# Altium PCB STM32F1xx.PcbDoc
Units mm, origin at the board's own origin, x right, y up, seen from the top; angles counter-clockwise.
Board outline 60.58 x 53.09 mm, 2 copper layers (Top Layer, Bottom Layer); 32 components, 61 nets, 183 pads, 186 vias.
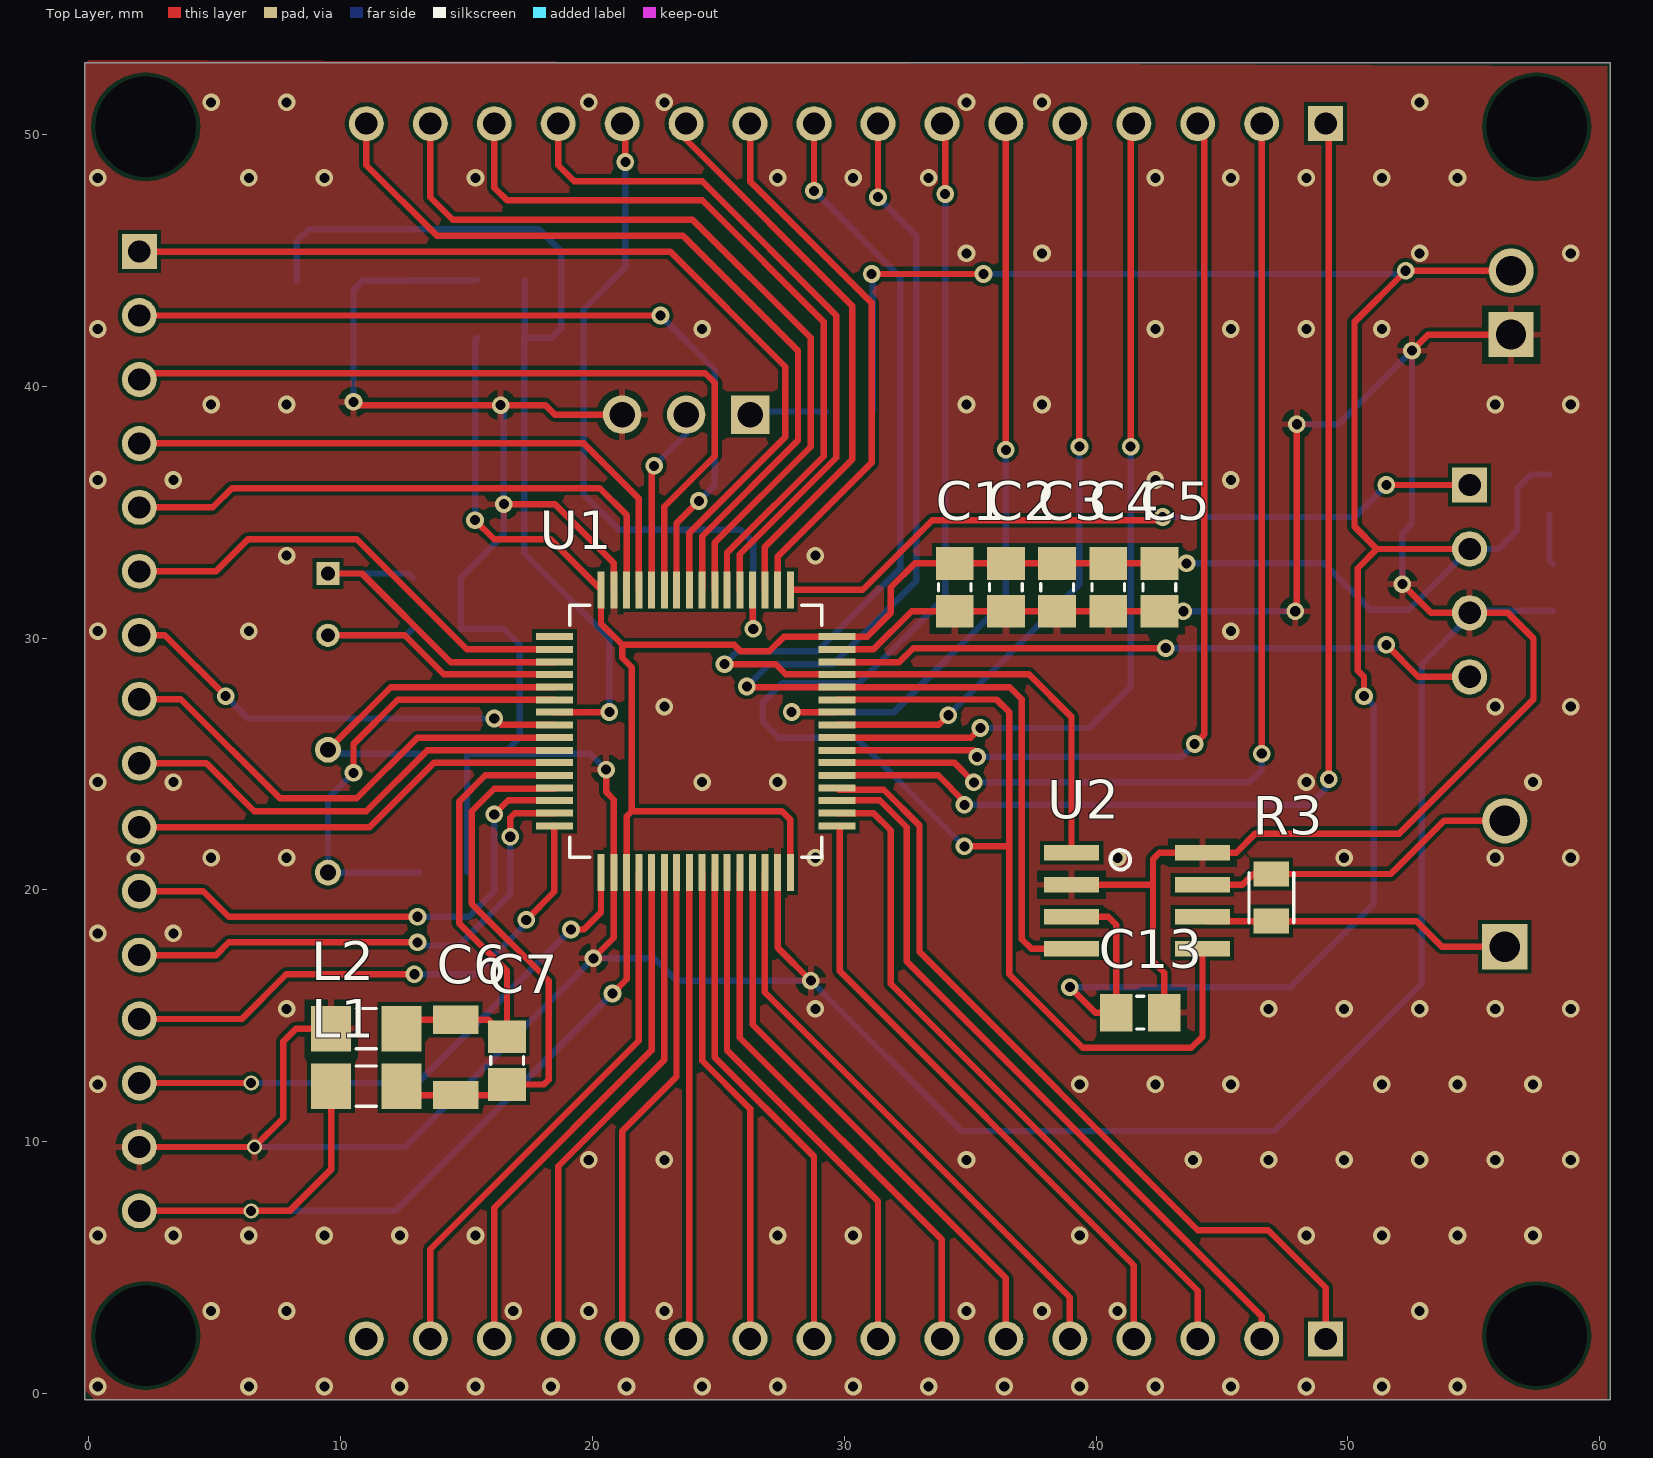
[diagram p0: Top Layer view]
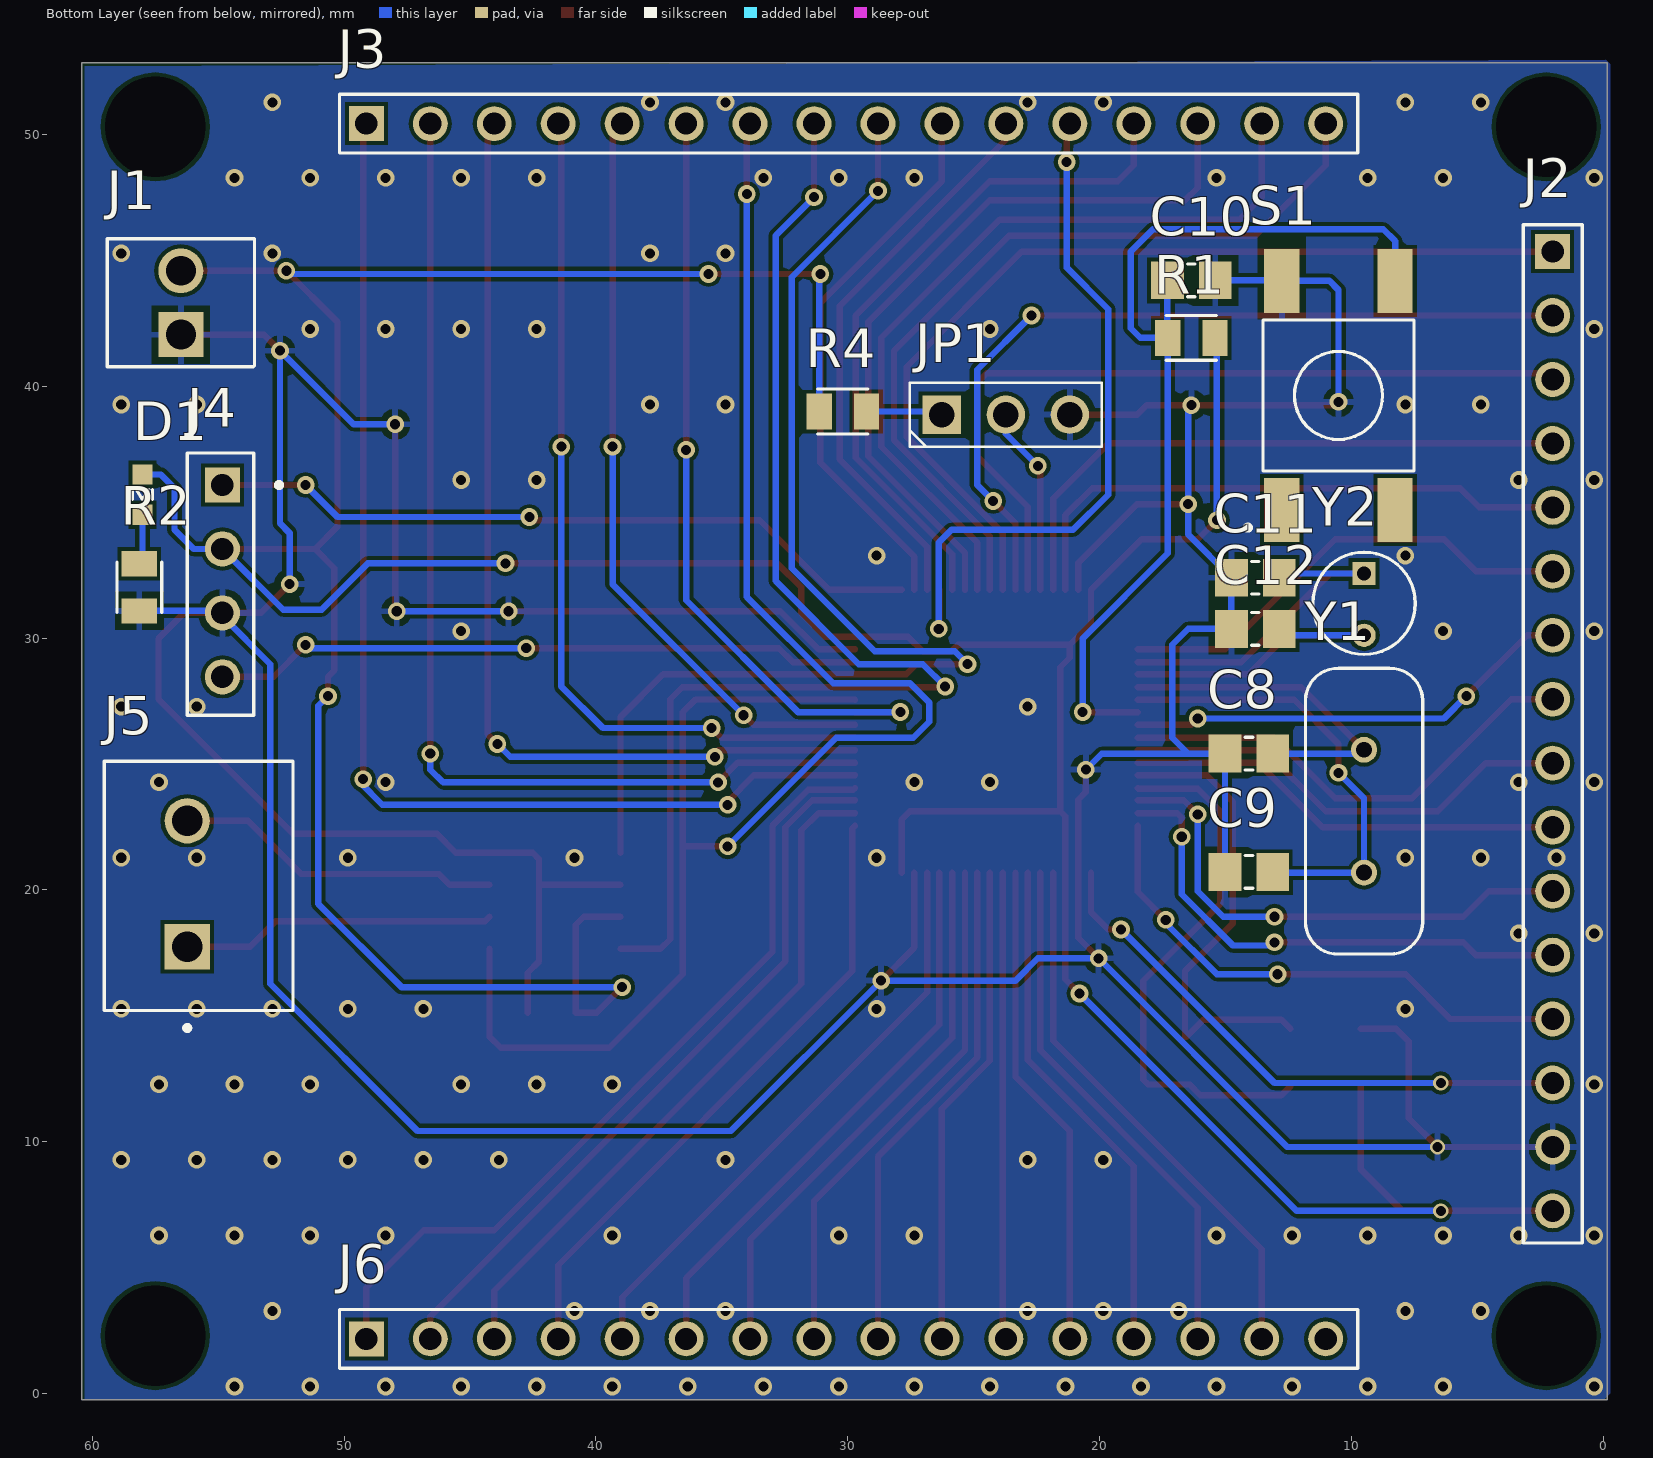
[diagram p1: Bottom Layer view, seen from below]
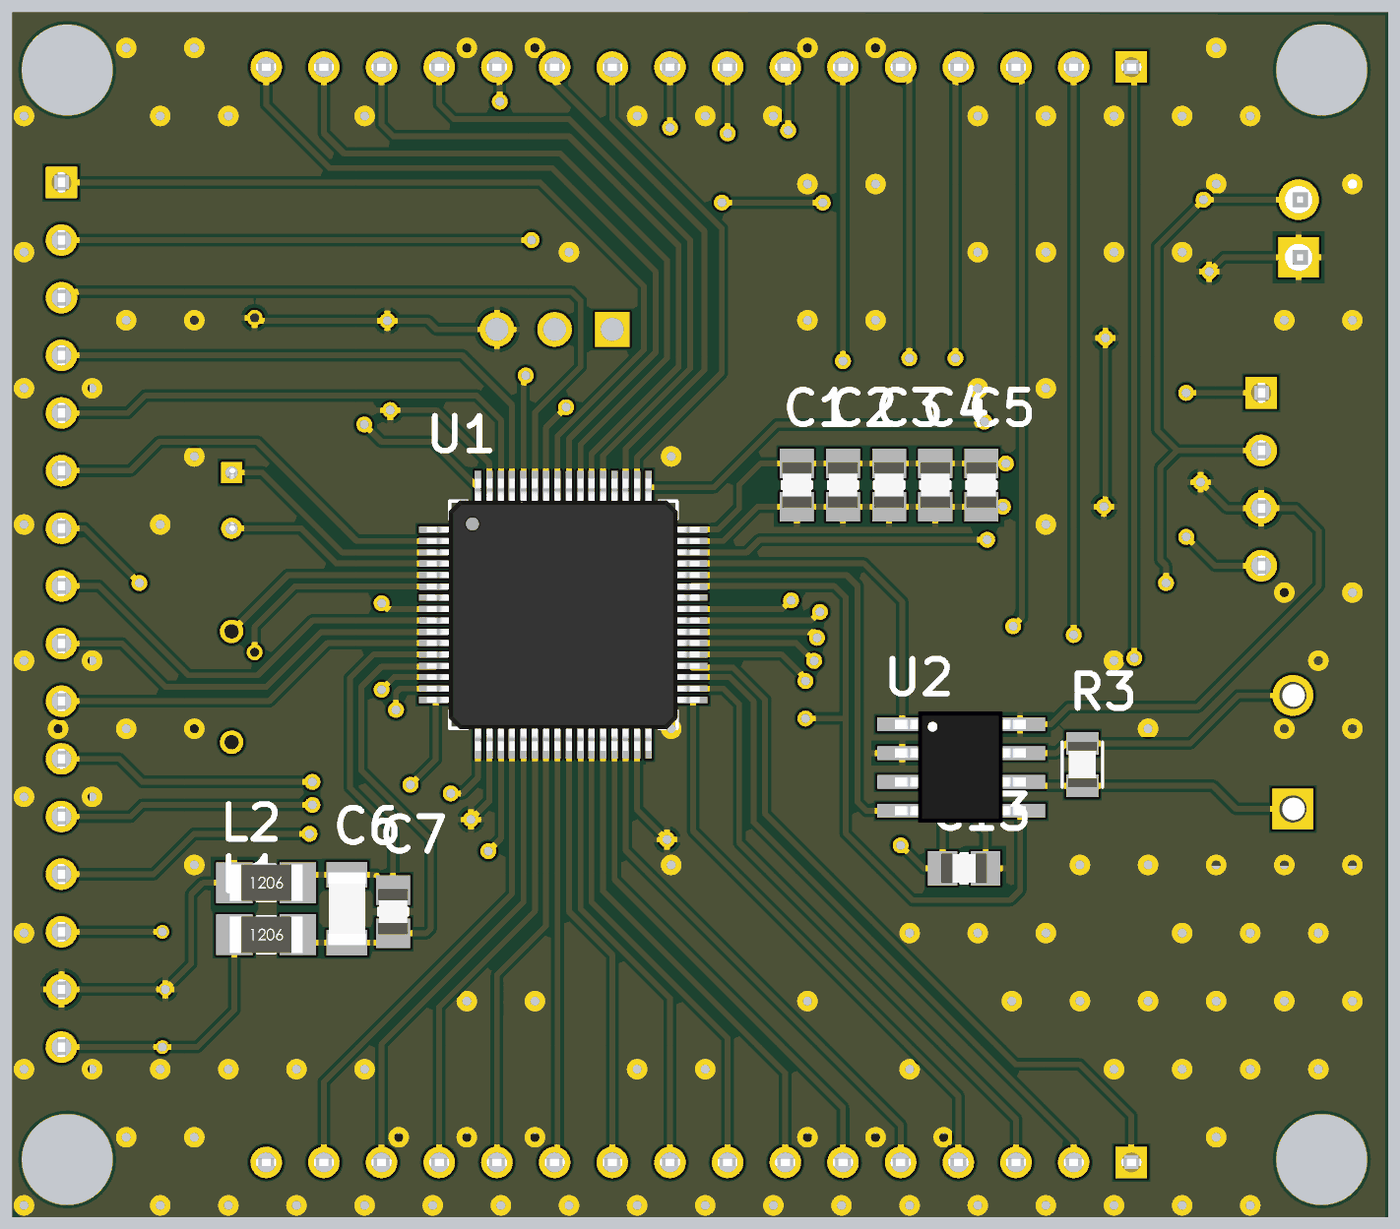
[diagram p2: 3D render of the assembled board from above, using the file's embedded part models]
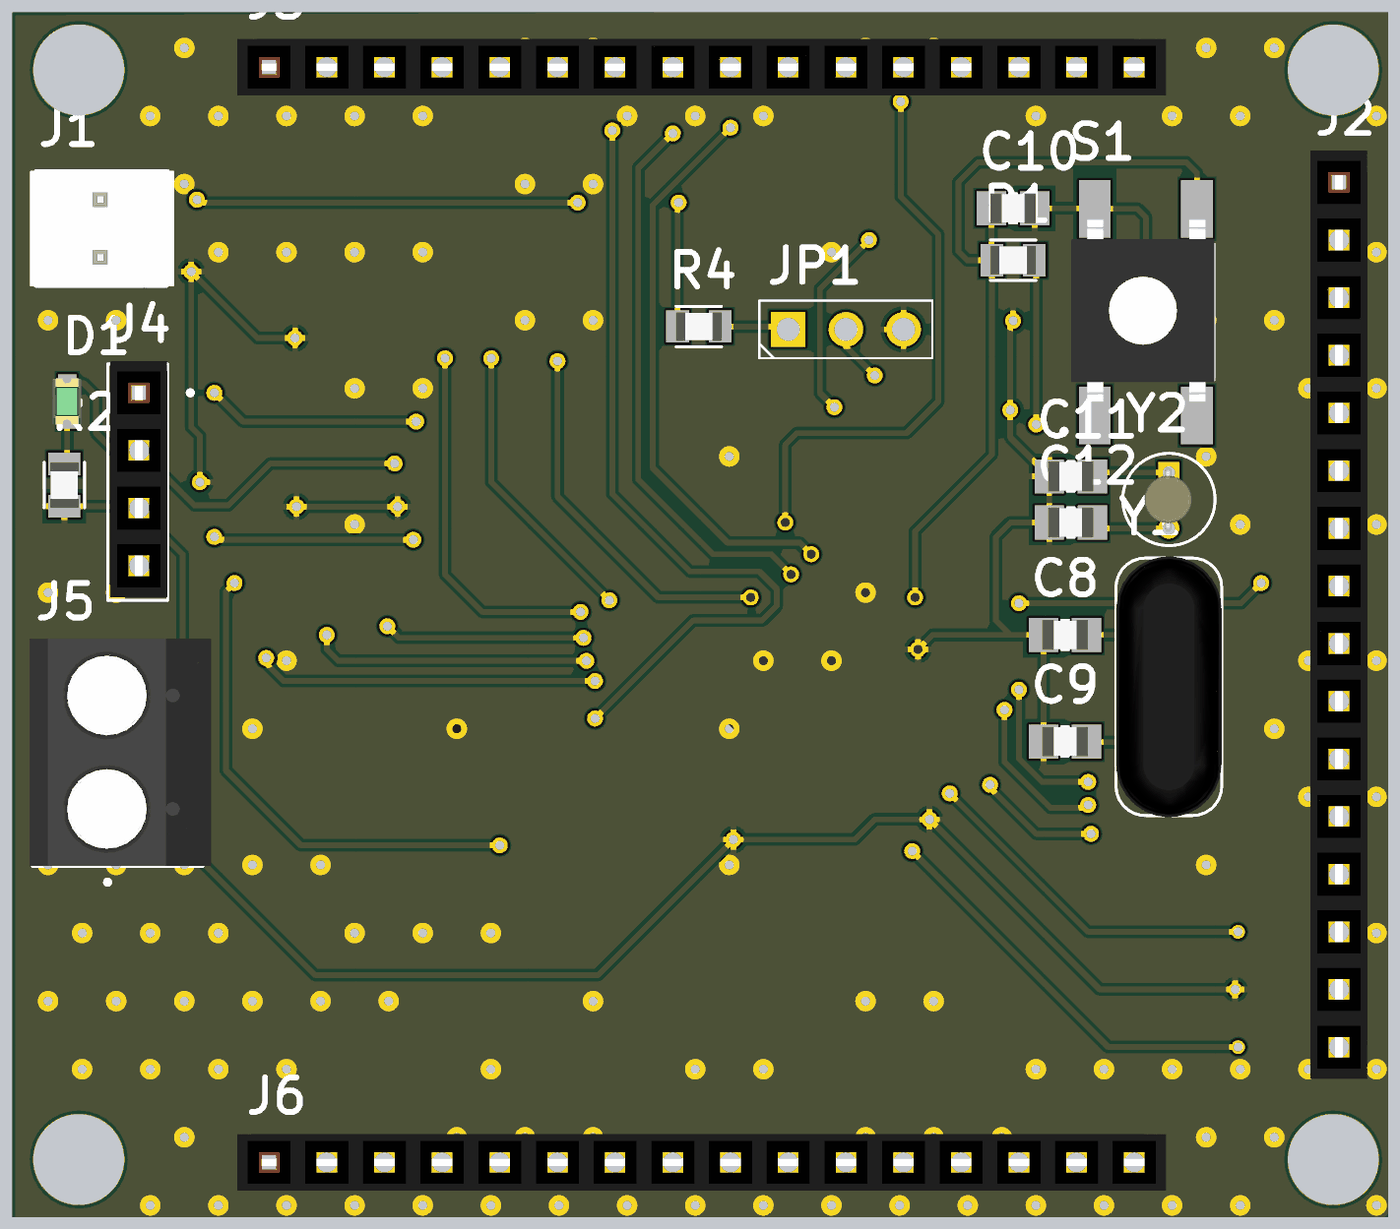
[diagram p3: 3D render of the assembled board from below, using the file's embedded part models]

## Layer stack, top to bottom
Top Solder: solder mask 0.0102, Solder Resist, Dk 3.5
Top Layer: signal copper 0.0356
Dielectric 1: dielectric 0.32, FR-4, Dk 4.8
Bottom Layer: signal copper 0.0356
Bottom Solder: solder mask 0.0102, Solder Resist, Dk 3.5

## Board outline
-0.159,-0.243 60.42,-0.243 60.42,52.843 -0.159,52.843

## Design rules (kind name [scope] priority, off if disabled: settings)
Clearance [All] p1: gap=0.15 ignorepadtopadclearanceinfootprint=FALSE
PolygonConnect [All] p1: connectstyle=Relief reliefconductorwidth=0.254 reliefentries=4 polygonreliefangle="90 Angle" airgapwidth=0.254
RoutingVias [All] p1: holewidth=0.4 width=0.7 viastyle="Through Hole" minholewidth=0.4 minwidth=0.7 maxholewidth=0.4 maxwidth=0.7
SolderMaskExpansion [All] p1: expansion=0.102
Width [All] p1: maxlimit=0.254 minlimit=0.254 preferedwidth=0.254
30 further rules are at their usual default settings.

## Components (designator, comment, footprint, x,y, rotation, side; value= is the part's Value field where it differs from the comment)
C1 "100 nF" *CAPC2012X135N 34.385,32.015 r270 top
C2 "100 nF" *CAPC2012X135N 36.417,32.015 r270 top
C3 "100 nF" *CAPC2012X135N 38.449,32.015 r270 top
C4 "100 nF" *CAPC2012X135N 40.481,32.015 r270 top
C5 "100 nF" *CAPC2012X135N 42.513,32.015 r270 top
C6 "10 uF" CAPC3216X94N 14.573,13.346 r270 top
C7 "100 nF" *CAPC2012X135N 16.605,13.219 r90 top
C8 "18 pF" *CAPC2012X135N 14.065,25.411 r0 bottom
C9 "18 pF" *CAPC2012X135N 14.065,20.712 r0 bottom
C10 "100 nF" *CAPC2012X135N 16.351,44.207 r180 bottom
C11 "18 pF" *CAPC2012X135N 13.811,32.396 r0 bottom
C12 "18 pF" *CAPC2012X135N 13.811,30.364 r0 bottom
C13 "0.1 uF" *CAPC2012X135N 41.751,15.124 r0 top
D1 "LED1206" WL-SMCW_0603 58.007,35.698 r90 bottom
J1 "Connector 3.3v input" *MOLEX_0022272031 56.483,44.588 r270 bottom
J2 "Pin Header" *TE_9-146281-0 2,26.3 r270 bottom
J3 "Pin Header" *TE_9-146281-0 30.067,50.43 r180 bottom
J4 "Programmer" TE_7-534206-0 54.832,32.269 r270 bottom
J5 "Terminal" TE_1776266-4 56.229,20.244 r90 bottom
J6 "Pin Header" *TE_9-146281-0 30.067,2.17 r180 bottom
JP1 "JMPR3" JMPR3 26.257,38.873 r180 bottom
L1 "Ferrite Bead" *RESC3216X70 11.017,12.203 r0 top
L2 "Ferrite Bead" *RESC3216X70 11.017,14.489 r0 top
R1 "10 KΩ" *RESC2012X65N 16.351,41.921 r180 bottom
R2 "10 KΩ" *RESC2012X65N 58.134,32.015 r90 bottom
R3 "120 Ω" *RESC2012X65N 46.958,19.696 r270 top
R4 "1KΩ" *RESC2012X65N 30.194,39 r0 bottom
S1 "Switch" SW_FSM4JSMAATR 10.509,39.635 r90 bottom
U1 "STM32F103RBT6" QFP50P1200X1200X160-64N 24.098,26.3 r0 top
U2 "SN65HVD233" *SOIC8 41.624,19.569 r0 top
Y1 "12 MHz" XTAL_ECS-80-18-4X 9.493,23.125 r270 bottom
Y2 "32.768 KHz" *XTAL_AB38T-32.768KHZ 9.493,31.38 r270 bottom

## Footprints (in the part's own frame and the unit in brackets; to place one, negate y for a bottom-side part, rotate by r counter-clockwise, add the part's x,y. Pads: shape width x height; smd on the part's side, far side on the other; paste and mask are expansions set on the pad)
*CAPC2012X135N [mm]
  rect 1.3x1.5 smd: 1(-0.95,0) 2(0.95,0)
  silkscreen extent -0.15,-0.65 0.15,0.65, body extent -1,-0.65 1,0.66, height 0.73
*MOLEX_0022272031 [mm]
  rect 1.785x1.785 hole 1.19: 1(2.54,0)
  round 1.785 hole 1.19: 2(0,0)
  silkscreen extent -1.27,-2.92 3.81,2.92, body extent -1.27,-3.17 3.81,3.18, height 10.69
*RESC2012X65N [mm]
  rect 1x1.42 smd: 1(-0.935,0) 2(0.935,0)
  silkscreen extent -1,-0.89 1,0.89, body extent -1,-0.63 1,0.63, height 0.43
*RESC3216X70 [mm]
  rect 1.6x1.8 smd: 1(-1.4,0) 2(1.4,0)
  silkscreen extent -0.4,-0.8 0.4,0.8, body extent -1.6,-0.8 1.6,0.8, height 1.31
*SOIC8 [mm]
  rect 2.2x0.6 smd: 1(-2.6,1.905) 2(-2.6,0.635) 3(-2.6,-0.635) 4(-2.6,-1.905) 5(2.6,-1.905) 6(2.6,-0.635) 7(2.6,0.635) 8(2.6,1.905)
  silkscreen extent -1.05,1.24 -0.27,2.01, body extent -2.93,-2.44 2.85,2.46, height 1.45
*TE_9-146281-0 [mm]
  rect 1.388x1.388 hole 0.88: 1(-19.05,0)
  round 1.388 hole 0.88: 2(-16.51,0) 3(-13.97,0) 4(-11.43,0) 5(-8.89,0) 6(-6.35,0) 7(-3.81,0) 8(-1.27,0) 9(1.27,0) 10(3.81,0) 11(6.35,0) 12(8.89,0) 13(11.43,0) 14(13.97,0) 15(16.51,0) 16(19.05,0)
  silkscreen extent -20.11,-1.17 20.32,1.17, body extent -20.44,-1.25 20.45,1.25, height 8.5
*XTAL_AB38T-32.768KHZ [mm]
  rect 0.925x0.925 hole 0.55: 1(-1.185,0)
  round 0.925 hole 0.55: 2(1.27,0)
  silkscreen extent -2.03,-2.03 2.03,2.03, body extent -1.4,-1.08 1.4,1.02, height 8.2
CAPC3216X94N [mil]
  rect 44x71 smd: 1(-59,0) 2(59,0)
  body extent -63,-33 63,33, height 60
JMPR3 [mil]
  rect 60x60 hole 40: 1(0,0)
  round 60 hole 40: 2(100,0) 3(200,0)
  silkscreen extent -50,-50 250,50, body extent -50,-50 250,50, height 300
QFP50P1200X1200X160-64N [mil]
  rect 58x11 smd: 1(-221,148) 2(-221,128) 3(-221,108) 4(-221,89) 5(-221,69) 6(-221,49) 7(-221,30) 8(-221,10) 9(-221,-10) 10(-221,-30) 11(-221,-49) 12(-221,-69) 13(-221,-89) 14(-221,-108) 15(-221,-128) 16(-221,-148) 33(221,-148) 34(221,-128) 35(221,-108) 36(221,-89) 37(221,-69) 38(221,-49) 39(221,-30) 40(221,-10) 41(221,10) 42(221,30) 43(221,49) 44(221,69) 45(221,89) 46(221,108) 47(221,128) 48(221,148)
  rect 11x58 smd: 17(-148,-221) 18(-128,-221) 19(-108,-221) 20(-89,-221) 21(-69,-221) 22(-49,-221) 23(-30,-221) 24(-10,-221) 25(10,-221) 26(30,-221) 27(49,-221) 28(69,-221) 29(89,-221) 30(108,-221) 31(128,-221) 32(148,-221) 49(148,221) 50(128,221) 51(108,221) 52(89,221) 53(69,221) 54(49,221) 55(30,221) 56(10,221) 57(-10,221) 58(-30,221) 59(-49,221) 60(-69,221) 61(-89,221) 62(-108,221) 63(-128,221) 64(-148,221)
  silkscreen extent -197,-197 197,197, body extent -236,-236 236,236, height 59
SW_FSM4JSMAATR [mm]
  rect 2.54x1.4 smd: 1(-4.55,2.25) 2(4.55,2.25) 3(-4.55,-2.25) 4(4.55,-2.25)
  silkscreen extent -5.35,-3 3,3.7, body extent -3.94,-3.02 4.06,3.28, height 3.1
TE_7-534206-0 [mm]
  rect 1.398x1.398 hole 0.89: 1(-3.81,0)
  round 1.398 hole 0.89: 2(-1.27,0) 3(1.27,0) 4(3.81,0)
  silkscreen extent -5.08,-1.4 5.33,2.34, body extent -5.2,-1.27 5.21,1.23, height 8.5
TE_1776266-4 [mm]
  rect 1.8x1.8 hole 1.2: 1(-2.5,0)
  round 1.8 hole 1.2: 2(2.5,0)
  silkscreen extent -5.83,-4.2 4.87,3.3, body extent -5,-4.57 5,3.43, height 10.16
WL-SMCW_0603 [mm]
  rect 0.8x0.8 smd: 1(-0.8,0) 2(0.8,0)
  silkscreen extent -0.2,-0.4 0.2,0.4, body extent -1.01,-0.62 1.01,0.63, height 1.1
XTAL_ECS-80-18-4X [mm]
  round 1.03 hole 0.63: 1(-2.44,0) 2(2.44,0)
  silkscreen extent -5.68,-2.33 5.68,2.33, body extent -5.75,-2.32 5.75,2.32, height 3.5

## Part data
C1 C2 C3 C4 C5 C7 C8 C9 C10 C11 C12 C13: library part GCD21BR71H104KA01L, "Cap Ceramic 0.1uF 50Vdc X7R 10% SMD 805 125°C Embossed T/R", Package="0805 Murata", Availability=Unavailable, MF="Murata Electronics", MP=GCD21BR71H104KA01L, Price=None, SnapEDA_Link=https://www.snapeda.com/parts/GCD21BR71H104KA01L/Murata%20Electronics%20North%20America/view-part/?ref=snap
C6: library part 1206YC104KAT2A, "1206 100 nF 16 V ±10 % Tolerance X7R SMT Multilayer Ceramic Capacitor", Package="1206 AVX", Availability=Unavailable, MF=AVX, MP=1206YC104KAT2A, Price=None, SnapEDA_Link=https://www.snapeda.com/parts/1206YC104KAT2A/AVX/view-part/?ref=snap
D1: library part WL-SMCW, "LED, 1206, AMBER, 140MCD, 605NM; Bulb Size: -; LED Colour: Ambre; Luminous Intensi", Package="1206 Würth Elektronik", Digi-Key_Part_Number=732-4988-1-ND, Digi-Key_Purchase_URL=https://www.digikey.com/product-detail/en/wurth-electronics-inc/150120AS75000/732-4988-1-ND/4489928?utm_source=snapeda&utm_medium=aggregator&utm_campaign=symbol, MF="Wurth Electronics", MP=150120AS75000, SnapEDA_Link=https://www.snapeda.com/parts/150120AS75000/Wurth%20Electronics%20Inc./view-part/?ref=snap
J1: library part 0022272031, "2.54mm _.100_ Pitch KK® Wire-to-Board Header, Vertical, with Friction Lock, 3 Circuits, Tin _Sn_ Plating", Package=None, Digi-Key_Part_Number=WM4112-ND, Digi-Key_Purchase_URL=https://www.digikey.co.uk/product-detail/en/molex/0022272031/WM4112-ND/1130578?utm_source=snapeda&utm_medium=aggregator&utm_campaign=symbol, MF=Molex, MP=0022272031, SnapEDA_Link=https://www.snapeda.com/parts/0022272031/Molex/view-part/?ref=snap
J2 J3 J6: "20 MODII HDR SRST", Created By="Alireza Nami"
J4: library part 7-534206-0, "40 MODII VRT DR CE 100/115", Package=None, Availability=Unavailable, Centerline_Pitch="2.54 mm[.1 in]", EU_RoHS_Compliance=Compliant, MF="TE Connectivity", MP=7-534206-0, Number_of_Positions=40, Price=None, Product_Type=Connector, SnapEDA_Link=https://www.snapeda.com/parts/7-534206-0/TE%20Connectivity%20AMP%20Connectors/view-part/?ref=snap, TE_purchase_URL=https://www.te.com/usa-en/product-7-534206-0.html?te_bu=Cor&te_type=disp&te_campaign=seda_glo_cor-seda-global-disp-prtnr-fy19-seda-model-bom-cta_sma-317_1&elqCampaignId=32493
J5: "Conn Terminal Block 2 POS 5mm Screw", Package=None, Availability=Unavailable, MF="TE Connectivity", MP=1776266-4, Price=None, SnapEDA_Link=https://www.snapeda.com/parts/1776266-4/TE%20Connectivity%20AMP%20Connectors/view-part/?ref=snap, TE_purchase_URL=https://www.te.com/usa-en/product-1776266-4.html?te_bu=Cor&te_type=disp&te_campaign=seda_glo_cor-seda-global-disp-prtnr-fy19-seda-model-bom-cta_sma-317_1&elqCampaignId=32493
JP1: Manufacturer="Sullins Connector Solutions", Manufacturer Part Number=PBC36SAAN, Supplier Part Number 1=S1011E-36-ND, Reel=Open, Supplier 1=Digi-Key
L1 L2: "CHIP BEAD, 1206, 68OHM, 100MHZ, 25%; Inductor Type: Ferrite Bead; Series: EXCML; Tolerance, Inductance: ± 25%; Resist...", Package="1206 Panasonic", Availability=Unavailable, MF=Panasonic, MP=EXCML32A680U, Price=None
R1 R2 R3 R4: library part CRGH0805F118R, "Res Thick Film 0805 118 Ohm 1% 1/3W ±100ppm/°C Molded SMD SMD T/R", Package="0805 TE Connectivity", Availability=Unavailable, MF="TE Connectivity", MP=CRGH0805F118R, Price=None, SnapEDA_Link=https://www.snapeda.com/parts/CRGH0805F118R/TE%20Connectivity%20Passive%20Product/view-part/?ref=snap, TE_purchase_URL=https://www.te.com/usa-en/product-1879509-5.html?te_bu=Cor&te_type=disp&te_campaign=seda_glo_cor-seda-global-disp-prtnr-fy19-seda-model-bom-cta_sma-317_1&elqCampaignId=32493
S1: library part FSM4JSMAATR, "spst, Tactile / Jog, Industrial Control, Switches, switch, white, smd, tactile", Package=None, Availability=Unavailable, MF=Alco, MP=FSM4JSMAATR, Price=None, SnapEDA_Link=https://www.snapeda.com/parts/FSM4JSMAATR/Alco/view-part/?ref=snap
U1: "Mainstream Performance line, ARM Cortex-M3 MCU with 128 Kbytes Flash, 72 MHz CPU, motor control, USB and CAN", Package="LQFP-64 STMicroelectronics", Digi-Key_Part_Number=497-6066-ND, Digi-Key_Purchase_URL=https://www.digikey.de/product-detail/en/stmicroelectronics/STM32F103RBT6/497-6066-ND/1646341?utm_source=snapeda&utm_medium=aggregator&utm_campaign=symbol, MF=STMicroelectronics, MP=STM32F103RBT6, SnapEDA_Link=https://www.snapeda.com/parts/STM32F103RBT6/STMicroelectronics/view-part/?ref=snap
U2: library part SN65HVD233MDREP, "Enhanced Product 3.3-V CAN Tranceiver 8-SOIC -55 to 125", Package="SOIC-8 Texas Instruments", Digi-Key_Part_Number=296-23973-1-ND, Digi-Key_Purchase_URL=https://www.digikey.co.uk/product-detail/en/texas-instruments/SN65HVD233MDREP/296-23973-1-ND/1981063?utm_source=snapeda&utm_medium=aggregator&utm_campaign=symbol, MF="Texas Instruments", MP=SN65HVD233MDREP, SnapEDA_Link=https://www.snapeda.com/parts/SN65HVD233MDREP/Texas%20Instruments/view-part/?ref=snap
Y1: library part ECS-80-18-4X, "HC-49USX Series 8 MHz ±30 ppm 18 pF -10 to +70 °C Through Hole Crystal - HC-49/U", Package="HC49/US ECS International", Digi-Key_Part_Number=X1093-ND, Digi-Key_Purchase_URL=https://www.digikey.co.uk/product-detail/en/ecs-inc/ECS-80-18-4X/X1093-ND/827584?utm_source=snapeda&utm_medium=aggregator&utm_campaign=symbol, MF="ECS Inc.", MP=ECS-80-18-4X, SnapEDA_Link=https://www.snapeda.com/parts/ECS-80-18-4X/ECS%20Inc./view-part/?ref=snap
Y2: library part AB38T-32.768KHZ, "AB38T Series 32.768 kHz ±20 ppm 12.5 pF -10 to +60 °C Tuning Fork Crystal", Package="Cylindrical Can Radial  Abracon", Availability=Unavailable, MF=Abracon, MP=AB38T-32.768KHZ, Price=None, SnapEDA_Link=https://www.snapeda.com/parts/AB38T-32.768KHZ/Abracon%20LLC/view-part/?ref=snap

## Free pads (board coordinates)
  round 0 hole 4: 11(57.499,2.297) 12(2.254,2.297) 13(57.499,50.303) 14(2.254,50.303)

## Via types
v1: diameter 0.7, hole 0.4, Top Layer to Bottom Layer, 183 vias
v2: diameter 0.6, hole 0.4, Top Layer to Bottom Layer, 3 vias

## Nets (pads, with @x,y where several pads share a name; then routed paths per layer and width w, separated by ;. In a path a pad name is that pad's centre, name@x,y a point inside that pad or via, vN(x,y) a via of type N, cw(c..) or ccw(c..) an arc to the next point about the centre after c; other vN are vias at no path point)
3v3: C1.1 C2.1 C3.1 C4.1 C5.1 C13.1 D1.2 J1.2 J2.16 J4.2 L1.1 R1.2 R4.2 U1.19 U1.32 U1.48 U1.64 U2.3 | length 193.9
  Top Layer w0.254: J2.16 v2(6.445,7.25) 7.969,7.25 9.617,8.898 L1.1 ; v1(15.335,34.682) 16.097,33.92 18.332,33.92 U1.64 20.339,30.567 21.177,29.729 ; v1(20.796,15.886) 21.355,16.445 U1.19 21.355,22.922 21.558,23.125 ; U1.32 27.857,22.795 27.527,23.125 21.558,23.125 ; v1(31.083,44.461) v1(35.528,44.461) ; v1(38.957,16.14) 39.973,15.124 C13.1 40.801,18.614 40.481,18.934 U2.3 ; v1(43.59,32.965) C5.1 C4.1 C3.1 C2.1 C1.1 32.795,32.965 31.845,32.015 31.845,30.999 30.905,30.059 U1.48 27.603,30.059 27.019,29.475 25.876,29.475 25.622,29.729 21.177,29.729 ; v1(50.641,27.697) 50.641,28.459 50.387,28.713 50.387,32.777 51.149,33.539 ; J4.2 51.149,33.539 ; J1.2 v1(52.292,44.588) 50.26,42.556 50.26,34.428 51.149,33.539 ; 21.177,29.729 21.177,29.221 21.558,28.84 21.558,23.125
  Bottom Layer w0.254: v2(6.445,7.25) 12.16,7.25 v1(20.796,15.886) ; v1(15.335,34.682) 15.335,41.84 R1.2 ; v1(31.083,44.461) 31.129,44.415 R4.2 ; v1(35.528,44.461) 52.165,44.461 v1(52.292,44.588) ; v1(38.957,16.14) 47.72,16.14 51.022,19.442 51.022,27.316 v1(50.641,27.697) ; v1(43.59,32.965) 49.056,32.965 50.895,31.126 52.419,31.126 J4.2 55.975,33.539 56.737,34.301 56.737,35.952 57.283,36.498 D1.2
GND: C1.2 C2.2 C3.2 C4.2 C5.2 C8.2 C9.2 C10.2 C11.2 C12.2 C13.2 J1.1 J2.15 J4.3 JP1.3 L2.1 R2.1 S1.2 U1.18 U1.31 U1.47 U1.63 U2.2 U2.8 | length 233.4
  Top Layer w0.254: J2.15 v2(6.572,9.79) 7.715,10.933 7.715,13.981 8.223,14.489 L2.1 ; v1(10.509,39.381) 10.636,39.254 v1(16.351,39.254) 18.129,39.254 18.51,38.873 JP1.3 ; v1(16.478,35.317) 18.51,35.317 20.847,32.98 U1.63 ; v1(20.034,17.283) 20.847,18.096 U1.18 20.847,23.582 20.542,23.887 v1(20.542,24.776) ; U1.31 27.349,17.715 v1(28.67,16.394) ; U1.47 31.159,29.551 32.673,31.065 C1.2 C2.2 C3.2 C4.2 C5.2 v1(43.463,31.065) ; U2.2 42.259,20.204 ; C13.2 42.701,16.714 42.259,17.156 42.259,20.204 ; v1(47.908,31.065) 47.974,30.999 v1(47.974,38.492) ; v1(52.165,32.142) 53.308,30.999 J4.3 56.356,30.999 57.372,29.983 57.372,27.57 52.038,22.236 46.323,22.236 45.561,21.474 U2.8 42.513,21.474 42.259,21.22 42.259,20.204 ; v1(52.546,41.413) 53.181,42.048 J1.1
  Bottom Layer w0.254: v2(6.572,9.79) 12.541,9.79 v1(20.034,17.283) 22.447,17.283 23.336,16.394 v1(28.67,16.394) 34.639,10.425 47.085,10.425 52.927,16.267 52.927,28.967 54.832,30.872 J4.3 54.913,31.08 R2.1 ; v1(10.509,39.381) 10.509,43.826 10.868,44.185 S1.2 12.781,44.207 C10.2 ; C9.2 C8.2 16.478,25.411 ; v1(16.351,39.254) 16.478,39.127 v1(16.478,35.317) 16.478,34.113 C11.2 C12.2 16.478,30.364 17.113,29.729 17.113,26.046 16.478,25.411 ; v1(20.542,24.776) 19.907,25.411 16.478,25.411 ; v1(43.463,31.065) v1(47.908,31.065) ; v1(47.974,38.492) 49.625,38.492 v1(52.546,41.413) 52.546,34.555 52.165,34.174 v1(52.165,32.142)
  other v1: 0.351,0.276 6.351,0.276 9.351,0.276 12.351,0.276 15.351,0.276 18.351,0.276 21.351,0.276 24.351,0.276 27.351,0.276 30.351,0.276 33.351,0.276 36.351,0.276 39.351,0.276 42.351,0.276 45.351,0.276 48.351,0.276 51.351,0.276 54.351,0.276 4.851,3.276 7.851,3.276 16.851,3.276 19.851,3.276 22.851,3.276 34.851,3.276 37.851,3.276 40.851,3.276 52.851,3.276 0.351,6.276 3.351,6.276 6.351,6.276 9.351,6.276 12.351,6.276 15.351,6.276 27.351,6.276 30.351,6.276 39.351,6.276 48.351,6.276 51.351,6.276 54.351,6.276 57.351,6.276 19.851,9.276 22.851,9.276 34.851,9.276 43.851,9.276 46.851,9.276 49.851,9.276 52.851,9.276 55.851,9.276 58.851,9.276 0.351,12.276 39.351,12.276 42.351,12.276 45.351,12.276 51.351,12.276 54.351,12.276 57.351,12.276 7.851,15.276 28.851,15.276 46.851,15.276 49.851,15.276 52.851,15.276 55.851,15.276 58.851,15.276 0.351,18.276 3.351,18.276 1.851,21.276 4.851,21.276 7.851,21.276 28.851,21.276 40.851,21.276 49.851,21.276 55.851,21.276 58.851,21.276 0.351,24.276 3.351,24.276 24.351,24.276 27.351,24.276 48.351,24.276 57.351,24.276 22.851,27.276 55.851,27.276 58.851,27.276 0.351,30.276 6.351,30.276 45.351,30.276 7.851,33.276 28.851,33.276 0.351,36.276 3.351,36.276 42.351,36.276 45.351,36.276 4.851,39.276 7.851,39.276 34.851,39.276 37.851,39.276 55.851,39.276 58.851,39.276 0.351,42.276 24.351,42.276 42.351,42.276 45.351,42.276 48.351,42.276 51.351,42.276 34.851,45.276 37.851,45.276 52.851,45.276 58.851,45.276 0.351,48.276 6.351,48.276 9.351,48.276 15.351,48.276 27.351,48.276 30.351,48.276 33.351,48.276 42.351,48.276 45.351,48.276 48.351,48.276 51.351,48.276 54.351,48.276 4.851,51.276 7.851,51.276 19.851,51.276 22.851,51.276 34.851,51.276 37.851,51.276 52.851,51.276
LBK: J3.7 U1.43 U2.5 | length 70.4
  Top Layer w0.254: U1.43 29.729,27.562 36.044,27.562 36.544,27.062 36.544,21.728 ; J3.7 34.004,50.303 v1(34.004,47.636) ; v1(34.766,21.728) 36.544,21.728 ; U2.5 44.224,14.168 43.783,13.727 39.465,13.727 36.544,16.648 36.544,21.728
  Bottom Layer w0.254: v1(34.004,47.636) 34.004,31.634 30.575,28.205 27.527,28.205 26.765,27.443 26.765,26.681 27.4,26.046 30.448,26.046 v1(34.766,21.728)
NetD1_1: D1.1 R2.2 | length 2
  Bottom Layer w0.254: D1.1 58.007,33.077 R2.2
NetJ5_1: J5.1 R3.2 U2.6 | length 12.5
  Top Layer w0.254: U2.6 44.397,18.761 R3.2 52.719,18.761 53.736,17.744 J5.1
NetJ5_2: J5.2 R3.1 U2.7 | length 13.1
  Top Layer w0.254: U2.7 45.815,20.204 46.242,20.631 R3.1 51.703,20.631 53.816,22.744 J5.2
NetJP1_1: JP1.1 R4.1 | length 3.1
  Bottom Layer w0.254: JP1.1 26.384,39 R4.1
NetJP1_2: JP1.2 U1.60 | length 7.5
  Top Layer w0.254: U1.60 22.345,36.739 v1(22.447,36.841)
  Bottom Layer w0.254: v1(22.447,36.841) 23.717,38.111 JP1.2
NRST: C10.1 R1.1 S1.4 U1.7 | length 38.1
  Top Layer w0.254: U1.7 v1(20.669,27.062)
  Bottom Layer w0.254: S1.4 8.259,45.767 8.731,46.239 17.875,46.239 18.764,45.35 18.764,42.302 18.383,41.921 R1.1 ; C10.1 17.301,41.936 R1.1 ; v1(20.669,27.062) 20.669,29.983 17.286,33.366 R1.1
OSC32in: C11.1 U1.3 Y2.1 | length 13.9
  Top Layer w0.254: Y2.1 10.848,32.565 14.37,29.043 U1.3
  Bottom Layer w0.254: Y2.1 12.692,32.565 C11.1
OSC32out: C12.1 U1.4 Y2.2 | length 13.1
  Top Layer w0.254: Y2.2 12.541,30.11 14.09,28.561 U1.4
  Bottom Layer w0.254: Y2.2 12.607,30.11 C12.1
OSCin: C8.1 U1.5 Y1.1 | length 13.7
  Top Layer w0.254: Y1.1 11.981,28.053 U1.5
  Bottom Layer w0.254: Y1.1 9.647,25.411 C8.1
OSCout: C9.1 U1.6 Y1.2 | length 17.9
  Top Layer w0.254: v1(10.509,24.649) 10.509,25.792 12.262,27.545 U1.6
  Bottom Layer w0.254: v1(10.509,24.649) 9.493,23.633 Y1.2 13.088,20.685 C9.1
PA0: J2.11 U1.14 | length 20.6
  Top Layer w0.254: J2.11 4.54,19.95 5.556,18.934 v1(13.049,18.934) ; v1(16.097,22.998) 16.656,23.557 U1.14
  Bottom Layer w0.254: v1(13.049,18.934) 15.081,18.934 16.097,19.95 v1(16.097,22.998)
PA1: J2.12 U1.15 | length 20.7
  Top Layer w0.254: J2.12 5.048,17.41 5.556,17.918 v1(13.049,17.918) ; v1(16.732,22.109) 16.732,22.871 16.91,23.049 U1.15
  Bottom Layer w0.254: v1(13.049,17.918) 13.176,17.791 14.7,17.791 16.732,19.823 v1(16.732,22.109)
PA2: J2.13 U1.16 | length 21.3
  Top Layer w0.254: J2.13 6.064,14.87 7.842,16.648 v1(12.922,16.648) ; v1(17.367,18.807) 18.485,19.925 U1.16
  Bottom Layer w0.254: v1(12.922,16.648) 15.335,16.648 17.367,18.68 v1(17.367,18.807)
PA3: J2.14 U1.17 | length 22.7
  Top Layer w0.254: J2.14 v2(6.445,12.33) ; v1(19.145,18.426) 19.653,18.426 20.339,19.112 U1.17
  Bottom Layer w0.254: v2(6.445,12.33) 13.049,12.33 v1(19.145,18.426)
PA4: J6.15 U1.20 | length 21.9
  Top Layer w0.254: J6.15 13.557,5.726 21.837,14.006 U1.20
PA5: J6.14 U1.21 | length 21.1
  Top Layer w0.254: J6.14 16.097,7.377 22.345,13.625 U1.21
PA6: J6.13 U1.22 | length 20.3
  Top Layer w0.254: J6.13 18.637,9.028 22.853,13.244 U1.22
PA7: J6.12 U1.23 | length 19.4
  Top Layer w0.254: J6.12 21.177,10.425 23.336,12.584 U1.23
PA8: J3.5 U1.41 | length 30.4
  Top Layer w0.254: U1.41 33.75,26.554 v1(34.131,26.935) ; J3.5 39.338,50.049 v1(39.338,37.603)
  Bottom Layer w0.254: v1(34.131,26.935) 39.338,32.142 v1(39.338,37.603)
PA9: J3.6 U1.42 | length 31.1
  Top Layer w0.254: v1(27.908,27.062) U1.42 ; v1(36.417,37.476) J3.6
  Bottom Layer w0.254: v1(27.908,27.062) 31.972,27.062 36.417,31.507 v1(36.417,37.476)
PA15: J3.10 U1.50 | length 22.1
  Top Layer w0.254: J3.10 26.257,48.144 31.083,43.318 31.083,36.968 27.349,33.234 U1.50
PB0: J6.9 U1.26 | length 20.1
  Top Layer w0.254: U1.26 24.86,13.346 28.797,9.409 J6.9
PB1: J6.8 U1.27 | length 21
  Top Layer w0.254: U1.27 25.343,13.625 31.337,7.631 J6.8
PB2: J6.7 U1.28 | length 21.8
  Top Layer w0.254: U1.28 25.851,14.133 33.877,6.107 J6.7
PB3: J3.15 U1.55 | length 31.9
  Top Layer w0.254: J3.15 13.557,47.509 14.446,46.62 23.971,46.62 28.67,41.921 28.67,37.603 24.86,33.793 U1.55
PB4: J3.16 U1.56 | length 32.9
  Top Layer w0.254: J3.16 11.017,48.779 13.811,45.985 23.59,45.985 28.162,41.413 28.162,37.857 24.352,34.047 U1.56
PB5: J2.1 U1.57 | length 38
  Top Layer w0.254: J2.1 23.082,45.35 27.654,40.778 27.654,37.984 23.844,34.174 U1.57
PB6: J2.2 U1.58 | length 33.1
  Top Layer w0.254: J2.2 v1(22.701,42.81) ; U1.58 23.336,34.555 v1(24.225,35.444)
  Bottom Layer w0.254: v1(22.701,42.81) 24.86,40.651 24.86,36.079 v1(24.225,35.444)
PB7: J2.3 U1.59 | length 32.2
  Top Layer w0.254: J2.3 2.254,40.524 24.479,40.524 24.86,40.143 24.86,37.222 22.853,35.215 U1.59
PB8: J2.4 U1.61 | length 24.4
  Top Layer w0.254: J2.4 19.653,37.73 21.837,35.546 U1.61
PB9: J2.5 U1.62 | length 23.1
  Top Layer w0.254: J2.5 4.921,35.19 5.683,35.952 20.288,35.952 21.355,34.885 U1.62
PB10: J6.6 U1.29 | length 22.7
  Top Layer w0.254: U1.29 26.359,14.641 36.417,4.583 J6.6
PB11: J6.5 U1.30 | length 23.5
  Top Layer w0.254: U1.30 26.841,15.937 38.957,3.821 J6.5
PB12: J6.4 U1.33 | length 25.3
  Top Layer w0.254: U1.33 29.813,22.439 29.813,16.775 41.497,5.091 J6.4
PB13: J6.3 U1.34 | length 27.7
  Top Layer w0.254: U1.34 31.159,23.049 31.845,22.363 31.845,16.267 44.037,4.075 J6.3
PB14: J6.2 U1.35 | length 29.4
  Top Layer w0.254: U1.35 31.413,23.557 32.48,22.49 32.48,17.156 46.577,3.059 J6.2
PB15: J6.1 U1.36 | length 32.6
  Top Layer w0.254: U1.36 29.777,23.974 31.568,23.974 32.988,22.553 32.988,17.537 44.037,6.488 46.831,6.488 49.117,4.202 J6.1
PC0: J2.7 U1.8 | length 18
  Top Layer w0.254: J2.7 3.016,30.11 v1(5.429,27.697) ; v1(16.097,26.808) 16.351,26.554 U1.8
  Bottom Layer w0.254: v1(5.429,27.697) 6.318,26.808 v1(16.097,26.808)
PC1: J2.8 U1.9 | length 19.1
  Top Layer w0.254: J2.8 3.651,27.57 7.588,23.633 10.636,23.633 13.049,26.046 U1.9
PC2: J2.9 U1.10 | length 18.3
  Top Layer w0.254: J2.9 4.667,25.03 6.572,23.125 11.017,23.125 13.43,25.538 U1.10
PC3: J2.10 U1.11 | length 17.5
  Top Layer w0.254: J2.10 11.144,22.49 13.709,25.055 U1.11
PC4: J6.11 U1.24 | length 18.6
  Top Layer w0.254: J6.11 23.844,2.297 U1.24
PC5: J6.10 U1.25 | length 19.3
  Top Layer w0.254: U1.25 24.352,13.219 26.257,11.314 J6.10
PC6: J3.1 U1.37 | length 46.9
  Top Layer w0.254: U1.37 33.725,24.547 34.766,23.506 v1(34.766,23.379) ; J3.1 49.244,50.303 v1(49.244,24.395)
  Bottom Layer w0.254: v1(34.766,23.379) 48.482,23.379 49.371,24.268 v1(49.244,24.395)
PC7: J3.2 U1.38 | length 43.1
  Top Layer w0.254: U1.38 34.36,25.055 v1(35.147,24.268) ; v1(46.577,25.411) J3.2
  Bottom Layer w0.254: v1(35.147,24.268) 46.069,24.268 46.577,24.776 v1(46.577,25.411)
PC8: J3.3 U1.39 | length 39.7
  Top Layer w0.254: U1.39 35.147,25.538 35.401,25.284 v1(35.274,25.284) ; v1(43.91,25.792) 44.291,26.173 44.291,50.176 J3.3
  Bottom Layer w0.254: v1(35.274,25.284) 43.402,25.284 v1(43.91,25.792)
PC9: J3.4 U1.40 | length 34.9
  Top Layer w0.254: U1.40 35.02,26.046 v1(35.401,26.427) ; v1(41.37,37.603) 41.37,50.303 J3.4
  Bottom Layer w0.254: v1(35.401,26.427) 39.719,26.427 41.37,28.078 v1(41.37,37.603)
PC10: J3.11 U1.51 | length 22.7
  Top Layer w0.254: J3.11 23.717,49.795 30.321,43.191 30.321,37.095 26.841,33.615 U1.51
PC11: J3.12 U1.52 | length 28
  Top Layer w0.254: J3.12 21.304,50.303 v1(21.304,48.906) ; U1.52 26.359,30.389 v1(26.384,30.364)
  Bottom Layer w0.254: v1(21.304,48.906) 21.304,44.715 19.653,43.064 19.653,35.698 21.05,34.301 25.876,34.301 26.384,33.793 v1(26.384,30.364)
PC12: J3.13 U1.53 | length 27.7
  Top Layer w0.254: J3.13 18.637,48.779 19.272,48.144 24.352,48.144 29.686,42.81 29.686,37.159 25.851,33.323 U1.53
PC13: J2.6 U1.2 | length 18.8
  Top Layer w0.254: J2.6 5.048,32.65 6.318,33.92 10.636,33.92 15.005,29.551 U1.2
PD2: J3.14 U1.54 | length 30.1
  Top Layer w0.254: J3.14 16.097,47.89 16.605,47.382 24.352,47.382 29.178,42.556 29.178,37.222 25.343,33.387 U1.54
RXD: J3.8 U1.44 U2.4 | length 50
  Top Layer w0.254: v1(26.13,28.078) 26.155,28.053 U1.44 36.569,28.053 37.052,27.57 37.052,18.045 37.433,17.664 U2.4 ; v1(31.337,47.509) J3.8
  Bottom Layer w0.254: v1(26.13,28.078) 27.019,28.967 29.559,28.967 32.861,32.269 32.861,45.985 v1(31.337,47.509)
SWCLK: J4.1 U1.49 | length 28.7
  Top Layer w0.254: U1.49 30.727,31.913 33.496,34.682 42.513,34.682 v1(42.64,34.809) ; v1(51.53,36.079) J4.1
  Bottom Layer w0.254: v1(42.64,34.809) 50.26,34.809 v1(51.53,36.079)
SWDIO: J4.4 U1.46 | length 25.9
  Top Layer w0.254: U1.46 32.175,29.043 32.734,29.602 v1(42.767,29.602) ; v1(51.53,29.729) 52.8,28.459 J4.4
  Bottom Layer w0.254: v1(42.767,29.602) 51.403,29.602 v1(51.53,29.729)
TXD: J3.9 U1.45 U2.1 | length 47.7
  Top Layer w0.254: v1(25.241,28.967) 27.273,28.967 27.679,28.561 U1.45 37.331,28.561 39.024,26.868 U2.1 ; v1(28.797,47.763) J3.9
  Bottom Layer w0.254: v1(25.241,28.967) 25.749,29.475 28.924,29.475 32.226,32.777 32.226,44.334 v1(28.797,47.763)
VDDA: C6.2 C7.1 L1.2 U1.13 | length 21.8
  Top Layer w0.254: L1.2 12.773,11.847 C6.2 15.995,11.847 16.417,12.269 C7.1 18.068,12.269 18.256,12.457 18.256,16.394 15.208,19.442 15.208,23.125 16.097,24.014 18.459,24.014 U1.13
VSSA: C6.1 C7.2 L2.2 U1.12 | length 19
  Top Layer w0.254: L2.2 12.773,14.845 C6.1 15.868,14.845 16.544,14.169 C7.2 16.605,16.775 14.7,18.68 14.7,23.506 15.741,24.547 U1.12
pads on no net: J6.16 S1.1 S1.3 U1.1

## Polygon pours and split planes (outlines as drawn)
GND on Top Layer "Top Layer-No Net" (solid, pour order 2): 60.293,52.716 60.293,-0.243 0.222,-0.243 -0.159,0.138 -0.159,52.97
GND on Bottom Layer "Bot Layer-No Net" (solid, pour order 4): 60.293,52.716 60.293,-0.243 -0.032,-0.243 -0.286,0.011 -0.286,52.97

## Silkscreen, mask and mechanical layers (free items; w line width, h text height)
Mechanical 1:
  the board outline again, w0.15